# Altium PCB PCB_1.PcbDoc
Units mil, origin at the board's own origin, x right, y up, seen from the top; angles counter-clockwise.
Board outline 2116 x 2600 mil, 2 copper layers (Top Layer, Bottom Layer); 21 components, 22 nets, 99 pads, 9 vias.
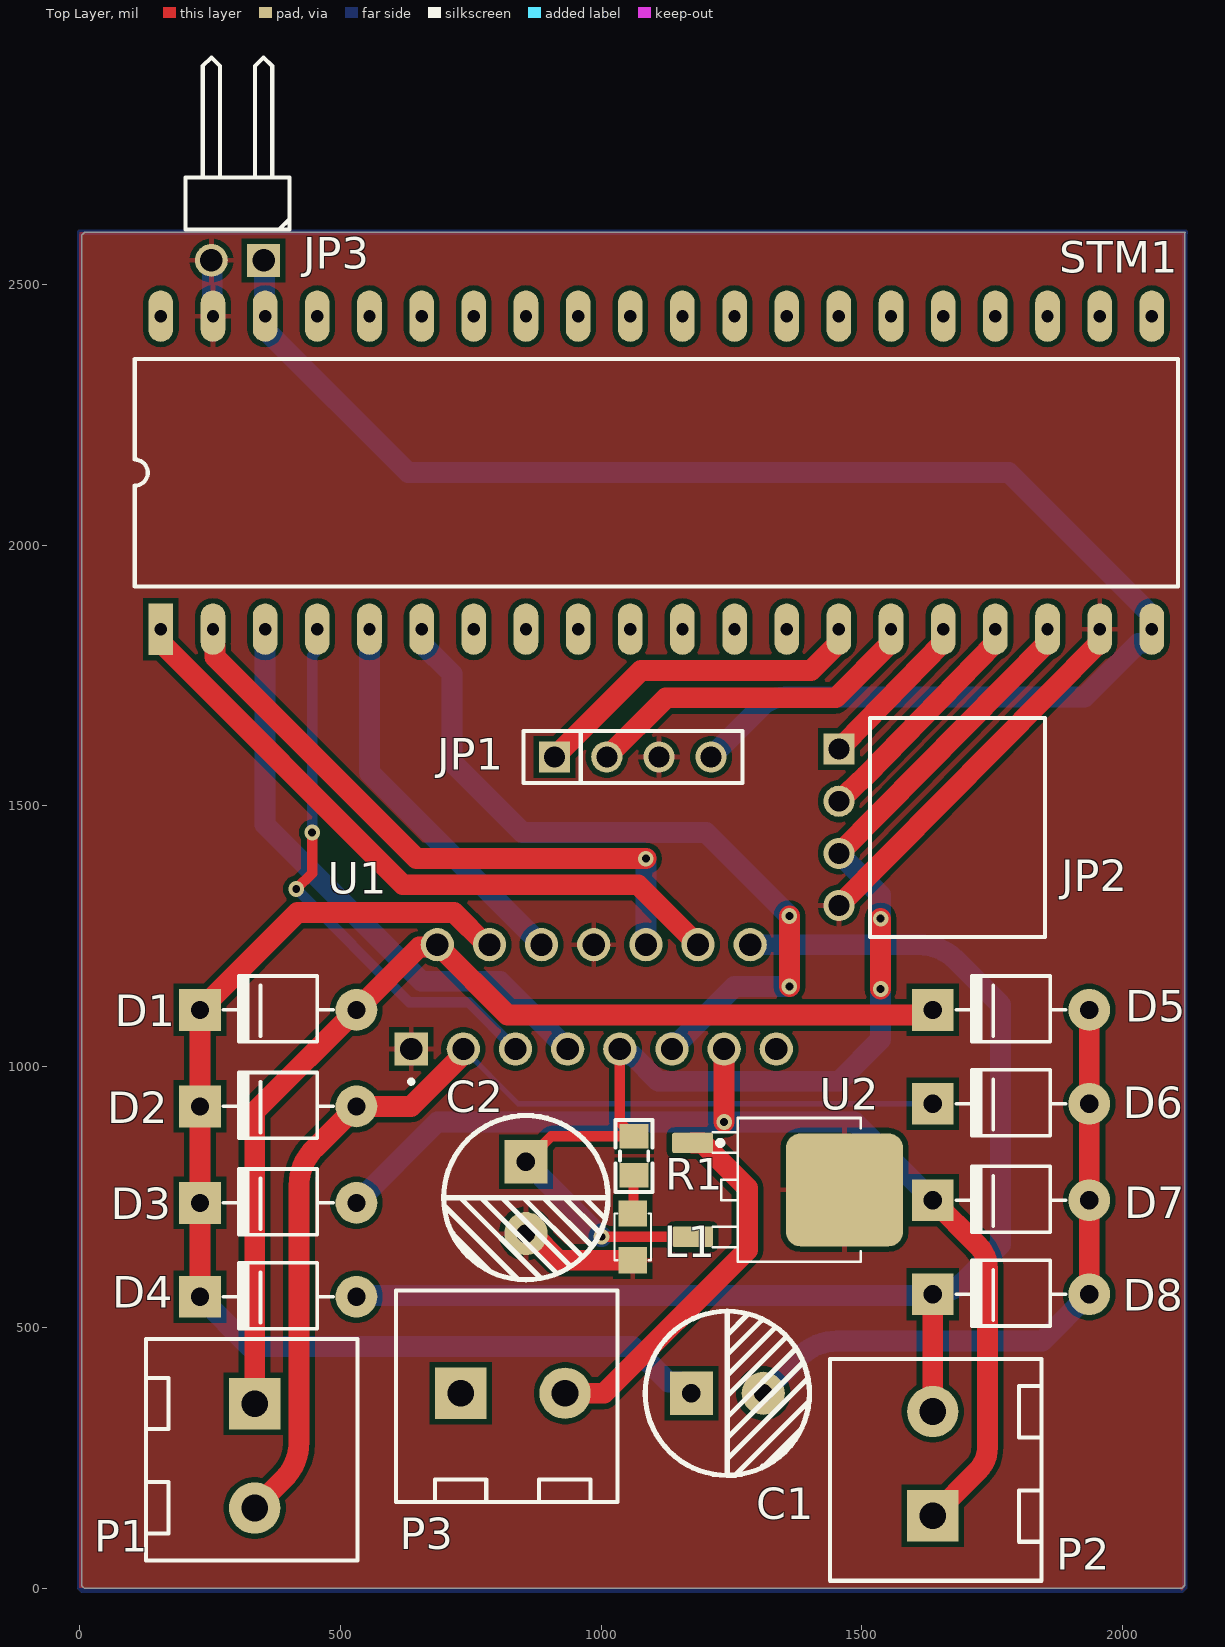
[diagram p0: Top Layer view]
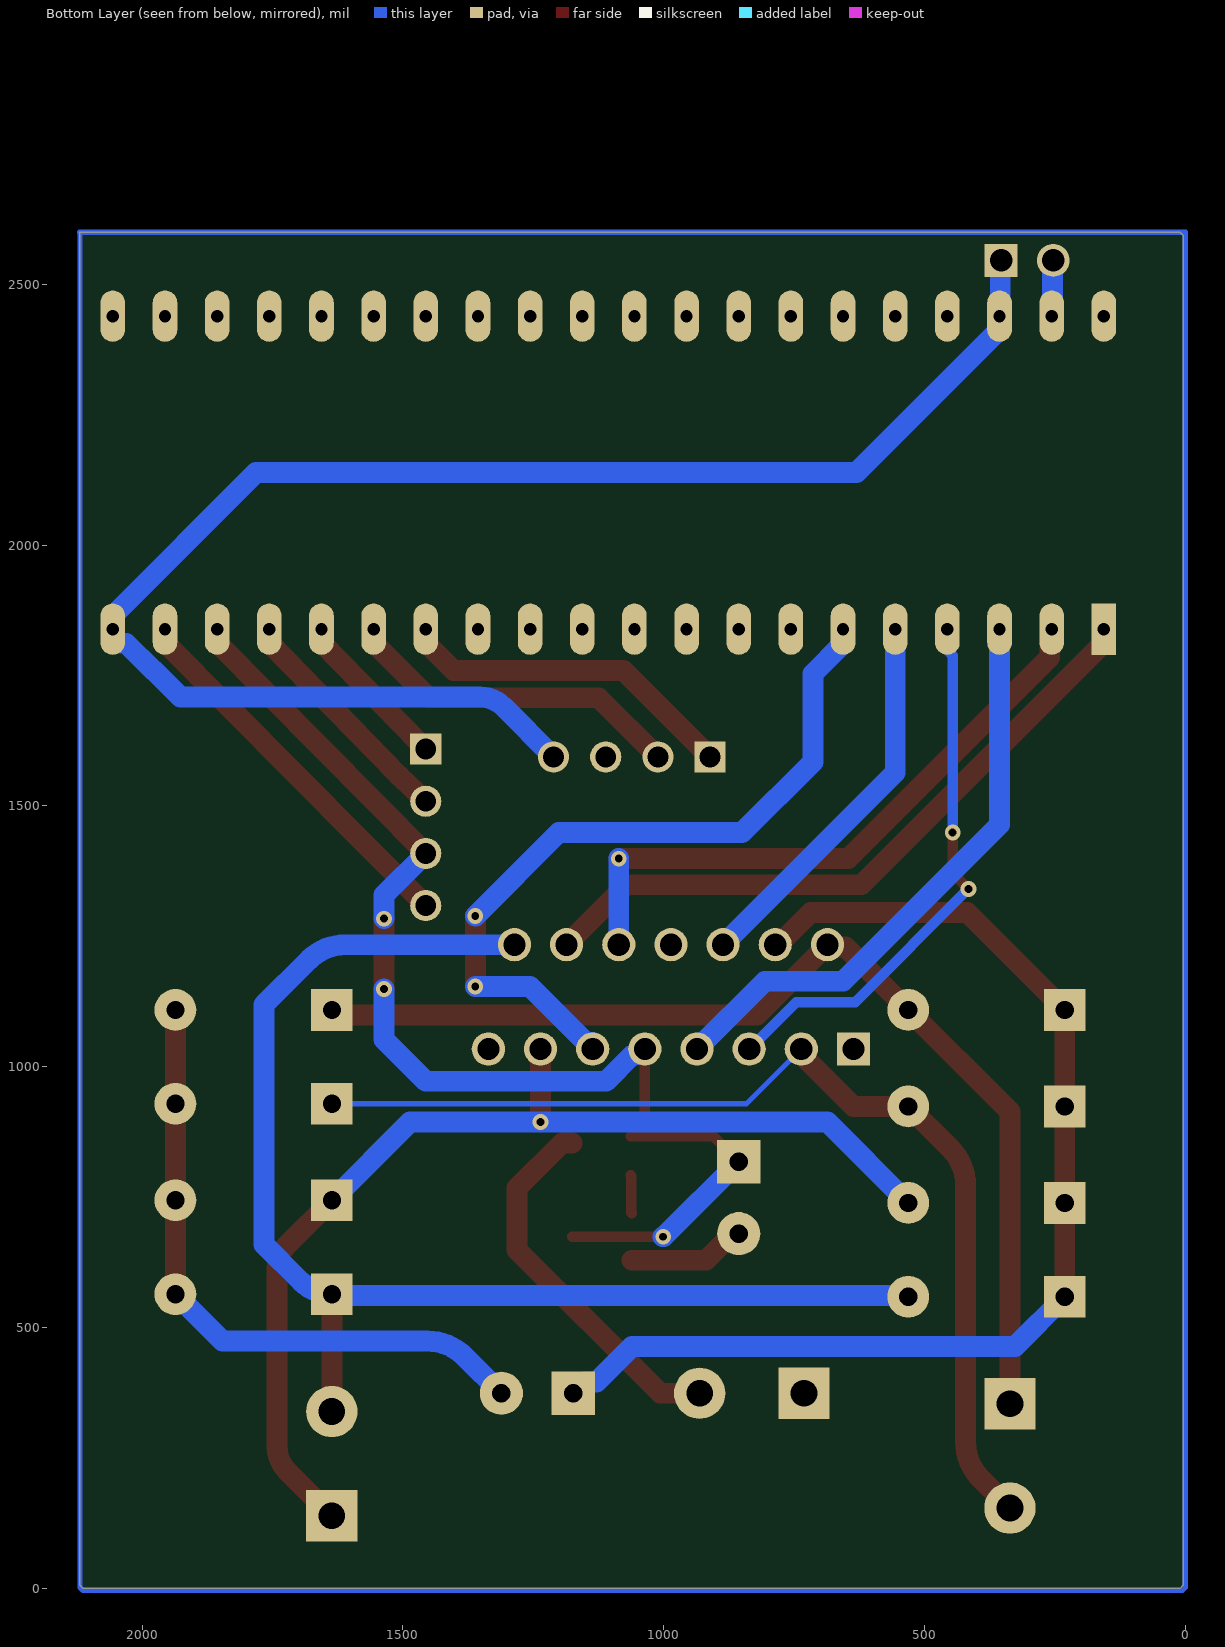
[diagram p1: Bottom Layer view, seen from below]
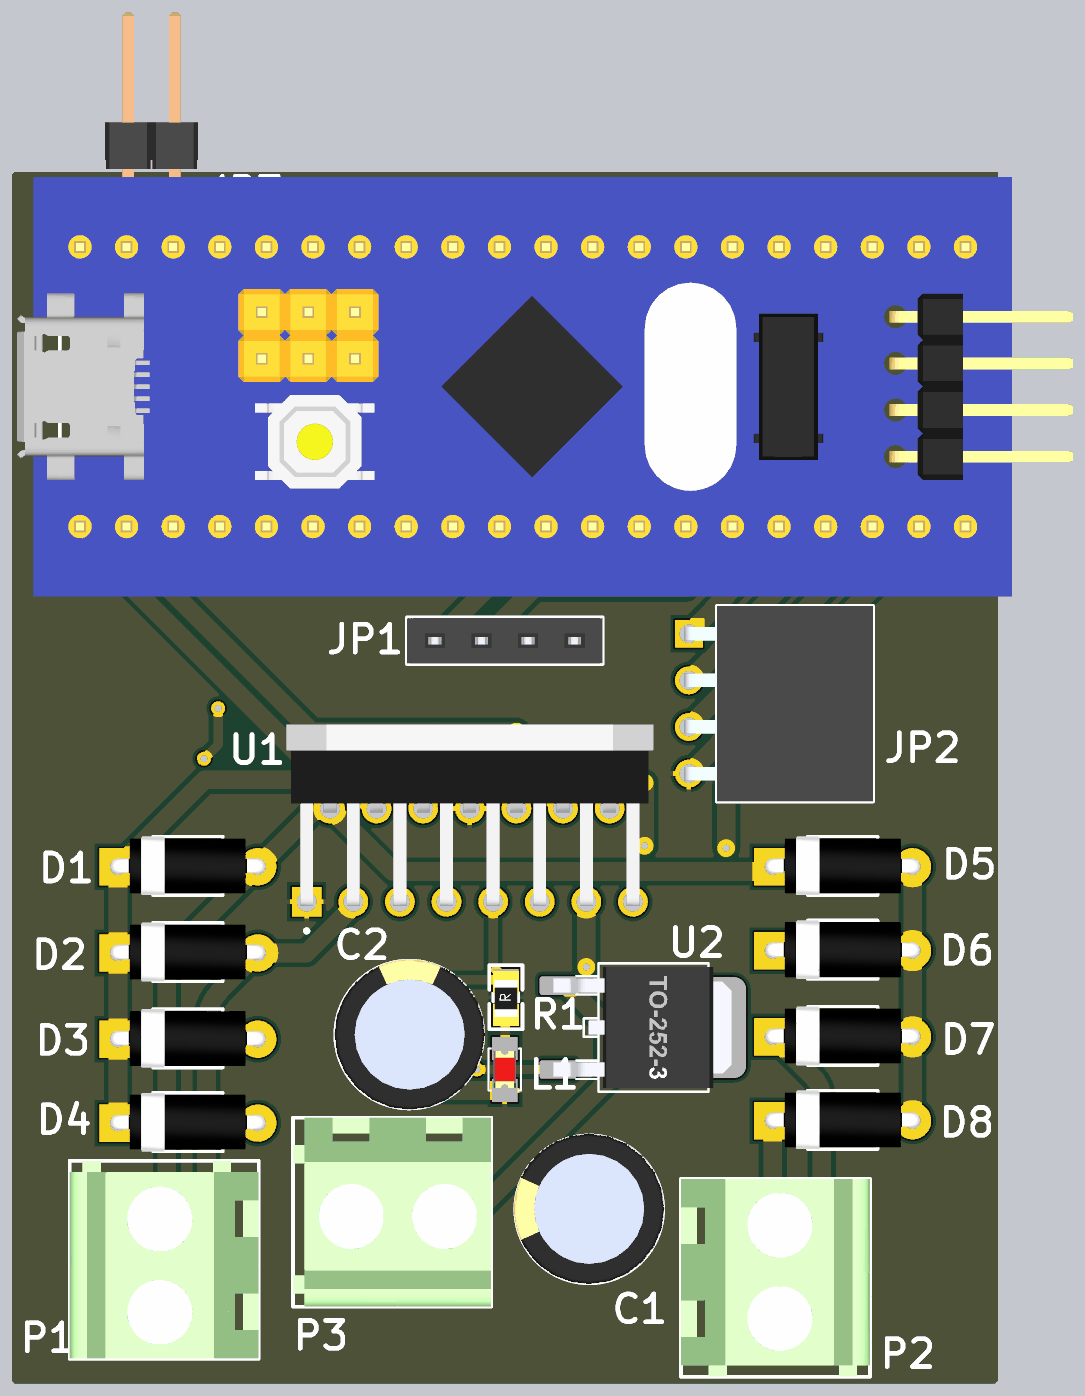
[diagram p2: 3D render of the assembled board from above, using the file's embedded part models]

## Layer stack, top to bottom
Top Solder: solder mask 0.4, Solder Resist, Dk 3.5
Top Layer: signal copper 1.4
Dielectric 1: dielectric 12.6, FR-4, Dk 4.8
Bottom Layer: signal copper 1.4
Bottom Solder: solder mask 0.4, Solder Resist, Dk 3.5

## Board outline
4.03,5.86 9.88,0 2113.17,0 2119.03,5.86 2119.03,2599 2120.03,2600 9.88,2600 4.03,2594.14

## Design rules (kind name [scope] priority, off if disabled: settings)
Clearance [All] p1: gap=10 ignorepadtopadclearanceinfootprint=FALSE except(0: Arc-Hole Track-Hole SMDPad-Hole THPad-Hole Via-Hole Fill-Hole Poly-Hole Region-Hole Text-Hole)
ComponentClearance [All] p1: gap=10 collisioncheckmode=3 verticalgap=4 showdistances=FALSE
PolygonConnect [All] p1: connectstyle=Relief reliefconductorwidth=10 reliefentries=4 polygonreliefangle="90 Angle" airgapwidth=10
RoutingVias [All] p1: holewidth=28 width=50 viastyle="Through Hole" minholewidth=10 minwidth=20 maxholewidth=15 maxwidth=30
SolderMaskExpansion [All] p1: expansion=4 istentingtop=FALSE
Width [All] p1: maxlimit=40 minlimit=10 preferedwidth=20
29 further rules are at their usual default settings.

## Components (designator, comment, footprint, x,y, rotation, side; value= is the part's Value field where it differs from the comment)
C1 "220nF" "tu hoa 8mm" 1242.13,374 r0 top
C2 "220nF" "tu hoa 8mm" 856.03,749 r270 top
D1 "100v" "DIODE 1A" 581.03,1109 r0 top
D2 "100v" "DIODE 1A" 581.03,924 r0 top
D3 "100v" "DIODE 1A" 581.03,739 r0 top
D4 "100v" "DIODE 1A" 581.03,559 r0 top
D5 "100v" "DIODE 1A" 1986.03,1109 r0 top
D6 "100v" "DIODE 1A" 1986.03,929 r0 top
D7 "100v" "DIODE 1A" 1986.03,744 r0 top
D8 "100v" "DIODE 1A" 1986.03,564 r0 top
JP1 "JP 1x4 2.54" "JP 1x4 CT" 911.03,1594 r0 top
JP2 "JP 1x4 2.54" "JP 1x4 CC" 1456.03,1459 r270 top
JP3 "JP 1x2 2.54" "JP 1x2 DC" 353,2546 r180 top
L1 "LED 0805" LED-0805-Red 1061.03,629 r90 top
P1 "Domino 2 pin" Domino_2pin_5.08mm 336.03,254 r270 top
P2 "Domino 2 pin" Domino_2pin_5.08mm 1636.03,239 r90 top
P3 "Domino 2 pin" Domino_2pin_5.08mm 831.03,374 r0 top
R1 "1k" "tro smd 0805" 1061.03,829 r90 top
STM1 "KIT STM32F103C8T6" "STM32F103 KIT" 156.03,1839 r90 top
U1 "L298N" L298N 636.03,1034 r90 top
U2 "78M05 SMD TO252" TO252 1321.03,764 r270 top

## Footprints (in the part's own frame and the unit in brackets; to place one, negate y for a bottom-side part, rotate by r counter-clockwise, add the part's x,y. Pads: shape width x height; smd on the part's side, far side on the other; paste and mask are expansions set on the pad)
"DIODE 1A" [mil] "Diode 1A"
  round 80 hole 35: 1(-50,0)
  rect 80x80 hole 35: 2(-350,0)
  silkscreen extent -305,-61 -95,65, body extent -366,-61 -34,65, height 122
Domino_2pin_5.08mm [mm]
  rect 2.5x2.5 hole 1.3: 1(-2.54,0)
  round 2.5 hole 1.3: 2(2.54,0)
  silkscreen extent -5.7,-5.3 5.1,5, body extent -5.68,-5.3 5.08,5, height 14.19
"JP 1x2 DC" [mm] "JP 1x2 DC"
  rect 1.6x1.6 hole 1.1: 1(0,0)
  round 1.6 hole 1.1: 2(2.54,0)
  silkscreen extent -1.27,-9.88 3.81,-1.5, body extent -1.27,-10.06 3.81,0.3, height 2.55
"JP 1x4 CC" [mm]
  rect 1.52x1.52 hole 1.02: 1(-3.81,0)
  round 1.52 hole 1.02: 2(-1.27,0) 3(1.27,0) 4(3.81,0)
  silkscreen extent -5.33,1.52 5.33,10.03, body extent -5.33,-0.25 5.33,10.05, height 2.51
"JP 1x4 CT" [mm]
  rect 1.52x1.52 hole 1.02: 1(0,0)
  round 1.52 hole 1.02: 2(2.54,0) 3(5.08,0) 4(7.62,0)
  silkscreen extent -1.52,-1.27 9.14,1.27, body extent -1.52,-1.25 9.14,1.25, height 8.51
L298N [mm]
  rect 1.62x1.62 hole 1.08: 1(0,0)
  round 1.62 hole 1.08: 2(5.08,-1.27) 3(0,-2.54) 4(5.08,-3.81) 5(0,-5.08) 6(5.08,-6.35) 7(0,-7.62) 8(5.08,-8.89) 9(0,-10.16) 10(5.08,-11.43) 11(0,-12.7) 12(5.08,-13.97) 13(0,-15.24) 14(5.08,-16.51) 15(0,-17.78)
  silkscreen extent -1.69,-0.1 -1.49,0.1, body extent -0.24,-18.89 9.65,1.11, height 23.85
LED-0805-Red [mil]
  rect 50x55 smd: 1(0,0) 2(90,0)
  silkscreen extent 0,-35 90,35, body extent 5,-25 85,25, height 43
"STM32F103 KIT" [mm]
  rect 2.5x1.2 hole 0.6: 1(0,0)
  oval 2.5x1.2 hole 0.6: 2(0,-2.54) 3(0,-5.08) 4(0,-7.62) 5(0,-10.16) 6(0,-12.7) 7(0,-15.24) 8(0,-17.78) 9(0,-20.32) 10(0,-22.86) 11(0,-25.4) 12(0,-27.94) 13(0,-30.48) 14(0,-33.02) 15(0,-35.56) 16(0,-38.1) 17(0,-40.64) 18(0,-43.18) 19(0,-45.72) 20(0,-48.26) 21(15.24,-48.26) 22(15.24,-45.72) 23(15.24,-43.18) 24(15.24,-40.64) 25(15.24,-38.1) 26(15.24,-35.56) 27(15.24,-33.02) 28(15.24,-30.48) 29(15.24,-27.94) 30(15.24,-25.4) 31(15.24,-22.86) 32(15.24,-20.32) 33(15.24,-17.78) 34(15.24,-15.24) 35(15.24,-12.7) 36(15.24,-10.16) 37(15.24,-7.62) 38(15.24,-5.08) 39(15.24,-2.54) 40(15.24,0)
  silkscreen extent 2.08,-49.53 13.16,1.27, body extent -3.81,-53.97 19.05,3.59, height 16.12
TO252 [mm] "TO252"
  round 0.5 on Mech15: 0(0,0)
  rrect25% 1x2 smd: 1(-2.285,-3.7) 3(2.285,-3.7)
  rrect25% 5.5x5.7 smd: 2(0,3.7)
  silkscreen extent -3.5,-2.7 3.5,4.5, body extent -3.3,-3.95 3.3,5.76, height 2.31
"tro smd 0805" [mm]
  rect 1.2x1.4 smd: 1(-0.946,-0.061) 2(0.954,-0.061)
  silkscreen extent -1.75,-0.97 1.75,0.84, body extent -1.56,-0.76 1.44,0.64, height 0.53
"tu hoa 8mm" [mm]
  rect 2.1x2.1 hole 0.9: 1(-1.75,0)
  round 2.1 hole 0.9: 2(1.75,0)
  silkscreen extent -4,-4 4,4, body extent -4.1,-4.07 4.1,4.13, height 13.81

## Part data
C1 C2: library part "Tu Hoa 220uF 35V 8x12", "Cắm", Chung_Loai=Cắm, Don_Vi=Con, Ma_Hang=MH006553, So_Chan=2, Ten_Linh_Kien="Tụ Hóa 220uF 35V 8x12MM"
D1 D2 D3 D4 D5 D6 D7 D8: library part "Diode 1N4007", "Cắm", Chung_Loai=Cắm, Don_Vi=Con, Ma_Hang=MH001063, Ten_Linh_Kien="Diode 1N4007 1A (DIP)"
JP1: library part "JP 1x4 2.54 Cai Thang", "Cắm", Chung_Loai=Cắm, Don_Vi=Con, Ma_Hang=MH004006, Ten_Linh_Kien="Jump Đơn Cái 2.54MM 1x20P Thẳng"
JP2: library part "JP 1x4 2.54 Cai Cong", "Cắm", Chung_Loai=Cắm, Don_Vi=Con, Ma_Hang=MH001265, Ten_Linh_Kien="Jump Đơn Cái 2.54MM 1x40P Cong"
JP3: library part "JP 1x2 2.54 Duc Cong", "Cắm", Chung_Loai=Cắm, Don_Vi=Con, Ma_Hang=MH000904, Ten_Linh_Kien="Jump Đơn Đực 2.54MM 1x40P Cong Đứng"
L1: library part "LED 0805 Do", "Dán", Chung_Loai=Dán, Don_Vi=Con, Ma_Hang=MH000897, Ten_Linh_Kien="LED 0805 Màu Đỏ (Red)"
P1 P2 P3: library part domino_2pin, "domino 2 pin"
R1: library part "Tro 0805 5% 1k", "Dán", Chung_Loai=Dán, Don_Vi=Con, Ma_Hang=MH005234, So_Chan=2, Ten_Linh_Kien="Trở 0805 5% 1k"
STM1: library part "STM32f103 Bluepill", "KIT STM32F103C8T6 Bluepill"
U1: "Half Bridge _4_ Driver DC Motors, Relays, Solenoids, Stepper Motors Bipolar 15-Multiwatt", Package="Multiwatt-15 STMicroelectronics", Availability=Unavailable, MF=STMicroelectronics, MP=L298N, Price=None, SnapEDA_Link=https://www.snapeda.com/parts/L298N/STMicroelectronics/view-part/294022/?ref=snap
U2: "Dán", Chung_Loai=Dán, Don_Vi=Con, Ma_Hang=MH001917, Ten_Linh_Kien="78M05 TO252"

## Via types
v1: diameter 30, hole 15, Top Layer to Bottom Layer, 9 vias

## Nets (pads, with @x,y where several pads share a name; then routed paths per layer and width w, separated by ;. In a path a pad name is that pad's centre, name@x,y a point inside that pad or via, vN(x,y) a via of type N, cw(c..) or ccw(c..) an arc to the next point about the centre after c; other vN are vias at no path point)
+3.3: JP1.4 JP3.1 STM1.20 STM1.38 | length 3016
  Bottom Layer w40: JP3.1 354.64,2544.36 354.64,2440.39 STM1.38 356.03,2413.41 630.44,2139 1781.62,2139 2056.03,1864.59 STM1.20 ; JP1.4 1307.34,1690.32 cw(c1352.45,1645.21) 1352.45,1709 1926.55,1709 1977.34,1759.79 1978.24,1759.79 2030.47,1812.02 STM1.20@2052.68,1812.02
+5: C2.1 JP2.3 R1.2 STM1.18 U1.9 U2.3 | length 2330.6
  Top Layer w20: C2.1 904.7,866.57 R1.2 1059.48,866.57 1045.86,880.2 1045.86,884.13 1036.03,893.97 U1.9 ; v1(1001.03,674) 1096.81,674 1096.85,674.04 U2.3
  Top Layer w40: JP2.3 1856.03,1813.41 STM1.18 ; v1(1536.03,1149) v1(1536.03,1284)
  Bottom Layer w40: C2.1 999.92,674 v1(1001.03,674) ; U1.9 1042.46,1034 1054.35,1022.11 1060.39,1022.11 1110.39,972.11 1455.7,972.11 1536.03,1052.43 v1(1536.03,1149) ; JP2.3 1536.03,1329 v1(1536.03,1284)
ENA: STM1.5 U1.6 | length 741.7
  Bottom Layer w40: STM1.5 556.03,1564 U1.6
ENB: STM1.6 U1.11 | length 1470.3
  Top Layer w40: v1(1361.03,1154) v1(1361.03,1289)
  Bottom Layer w40: STM1.6 656.03,1811.45 713.98,1753.49 713.98,1584.56 849.54,1449 1201.03,1449 v1(1361.03,1289) ; U1.11@1136.03,1046.72 U1.11 1256.03,1154 v1(1361.03,1154)
GND: C2.2 JP1.3 JP2.4 JP3.2 L1.1 STM1.19 STM1.39 U1.1 U1.8 U2.2 | length 1070.2
  Top Layer w40: C2.2 867.57,680.1 918.68,629 L1.1 ; JP2.4 1956.03,1813.41 STM1.19
  Bottom Layer w40: JP3.2 254.64,2544.36 254.64,2440.39 STM1.39
IN1: STM1.4 U1.5 | length 1062.5
  Top Layer w20: v1(415.56,1340.83) 446.03,1371.3 v1(446.03,1449)
  Bottom Layer w20: v1(415.56,1340.83) 632.39,1124 746.03,1124 U1.5 ; v1(446.03,1449) 446.03,1788.07 450.81,1792.86 450.81,1833.79 STM1.4
IN2: STM1.3 U1.7 | length 1133.1
  Bottom Layer w40: STM1.3 356.03,1464 656.03,1164 806.03,1164 U1.7
IN3: STM1.2 U1.10 | length 1206.5
  Top Layer w40: STM1.2 256.03,1811.45 259.65,1807.83 259.65,1785.38 646.03,1399 v1(1086.03,1399)
  Bottom Layer w40: U1.10 v1(1086.03,1399)
IN4: STM1.1 U1.12 | length 1295.6
  Top Layer w40: STM1.1 156.03,1813.41 620.44,1349 1071.03,1349 U1.12
NetC1_1: C1.1 D1.2 D2.2 D3.2 D4.2 U1.4 | length 2226.9
  Top Layer w40: D4.2 D3.2 D2.2 D1.2 417.92,1295.89 717.96,1295.89 779.85,1234 U1.4
  Bottom Layer w40: D4.2 326.03,464 1060.36,464 1129.02,395.34 1151.89,395.34 C1.1
NetC1_2: C1.2 D5.1 D6.1 D7.1 D8.1 | length 1244.4
  Top Layer w40: D8.1 D7.1 D6.1 D5.1
  Bottom Layer w40: C1.2 1381.74,444.71 cw(c1452.45,374) 1452.45,474 1846.03,474 D8.1
NetD1_1: D1.1 D5.2 P1.1 U1.2 | length 2052.6
  Top Layer w40: P1.1 336.03,914 538.68,1116.65 651.48,1229.45 681.48,1229.45 U1.2 821.03,1099 1626.03,1099 D5.2
NetD2_1: D2.1 D6.2 P1.2 U1.3 | length 2042.1
  Top Layer w40: P1.2 391.74,209.71 ccw(c321.03,280.42) 421.03,280.42 421.03,772.58 cw(c521.03,772.58) 450.32,843.29 D2.1 636.03,924 731.48,1019.45 731.48,1029.45 U1.3
  Bottom Layer w10: U1.3 838.1,931.93 841.03,929 D6.2
NetD3_1: D3.1 D7.2 P2.1 U1.13 | length 2057.8
  Top Layer w40: v1(1236.03,894) U1.13 ; P2.1 1721.74,224.71 ccw(c1675.17,271.28) 1741.03,271.28 1741.03,613.14 ccw(c1678.6,613.14) 1722.74,657.28 D7.2
  Bottom Layer w40: D3.1 686.03,894 v1(1236.03,894) 1486.03,894 D7.2
NetD4_1: D4.1 D8.2 P2.2 U1.14 | length 2481.1
  Top Layer w40: P2.2 D8.2
  Bottom Layer w40: D4.1 533.53,561.5 1633.53,561.5 D8.2 ccw(c1636.03,648.5) 1695.77,588.75 1766.03,659 1766.03,1119 1680.32,1204.71 ccw(c1609.6,1134) 1609.6,1234 U1.14
NetL1_2: L1.2 R1.1 | length 73.8
  Top Layer w20: L1.2 1062.22,720.2 1062.22,790.57 R1.1
NetP3_2: P3.2 U2.1 | length 723.8
  Top Layer w40: P3.2 1006.03,374 1281.03,649 1281.03,767.35 1194.41,853.96 U2.1
RX: JP1.2 STM1.15 | length 661.5
  Top Layer w40: JP1.2 1124.36,1707.33 1449.95,1707.33 1556.03,1813.41 STM1.15
SCL: JP2.1 STM1.16 | length 311.6
  Top Layer w40: JP2.1 1465.95,1618.92 1656.03,1813.41 STM1.16
SDA: JP2.2 STM1.17 | length 453
  Top Layer w40: JP2.2 1506.67,1557.39 ccw(c1485.95,1579.08) 1507.44,1558.15 1756.03,1813.41 STM1.17
TX: JP1.1 STM1.14 | length 661.5
  Top Layer w40: JP1.1 1076.81,1759.79 1402.4,1759.79 1456.03,1813.41 STM1.14
VCC: P3.1
pads on no net: STM1.7 STM1.8 STM1.9 STM1.10 STM1.11 STM1.12 STM1.13 STM1.21 STM1.22 STM1.23 STM1.24 STM1.25 STM1.26 STM1.27 STM1.28 STM1.29 STM1.30 STM1.31 STM1.32 STM1.33 STM1.34 STM1.35 STM1.36 STM1.37 STM1.40 U1.15 U2.0
copper on no net: | length 9441.1
  Bottom Layer w10: 0,1.61 5.86,-4.25 2113.17,-4.25 2119.03,1.61 2119.03,2599 2120.03,2600 0,2600 0,1.61

## Polygon pours and split planes (outlines as drawn)
GND on Top Layer "GND_L01_P000" (solid, remove dead copper, pour order 0): 0,2600 0.5,2599.5 2119.53,2599.5 2119.53,2.11 2113.17,-4.25 2107.31,1.61 0,1.61 0,2600